# EAGLE board HW2 (EAGLE 8.6.0)
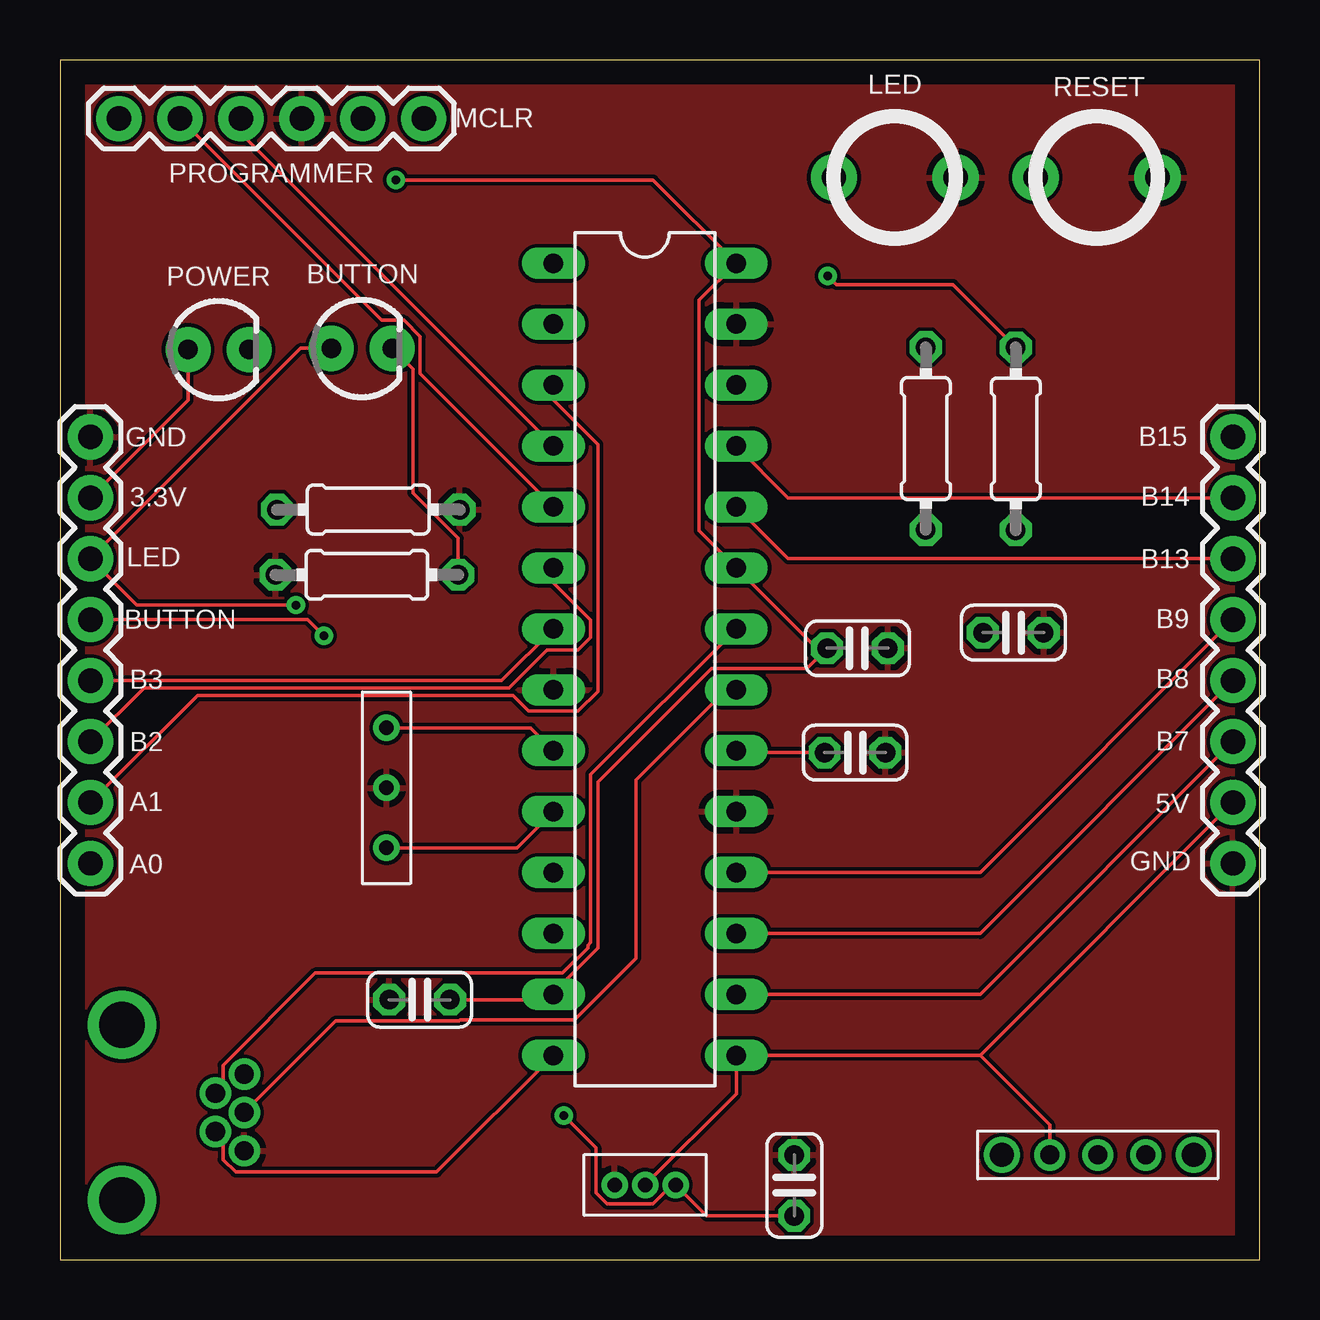
[diagram p0: board, top side]
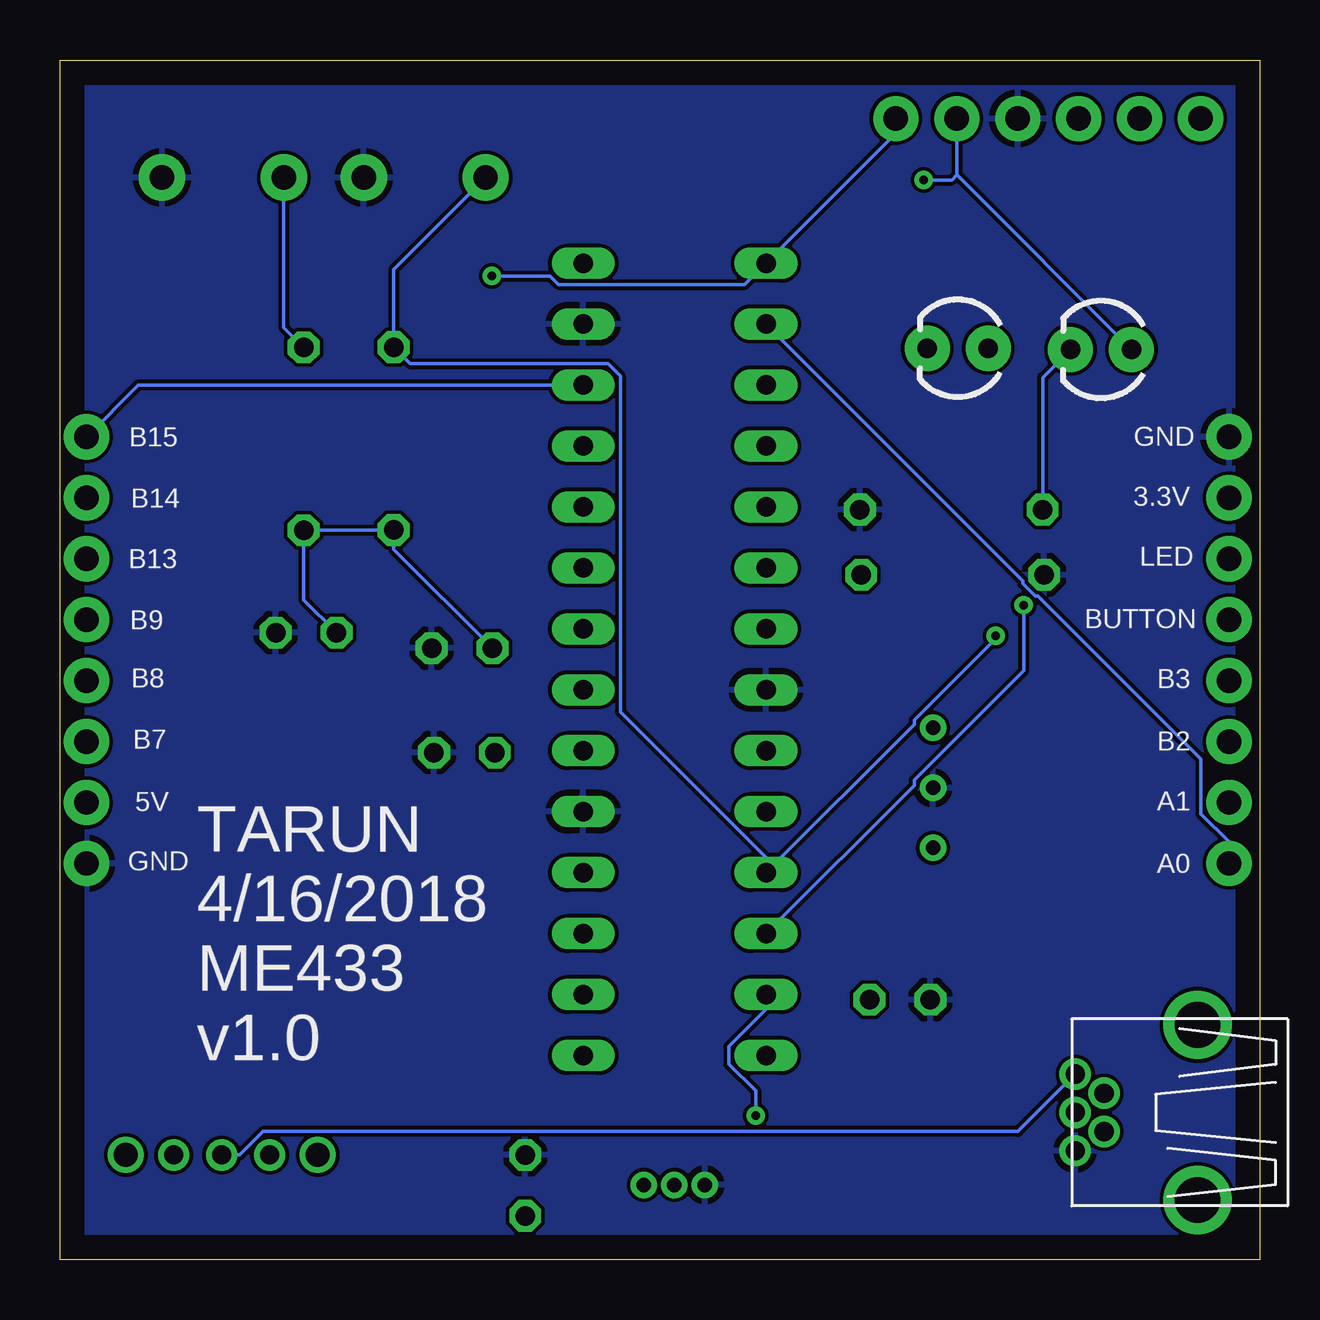
[diagram p1: board, bottom side, seen from below]

Size 50 x 50 mm. Coordinates in mm from the lower left corner, seen from the top.
Outline: 0,0 50,0 50,50 0,50 0,0
Copper layers (1*16): Top 0.035mm / dielectric 1.5mm / Bottom 0.035mm
Design rules "default": minimum track width 6mil, minimum drill 0.35mm, track to track 6mil, track to pad 6mil, pad to pad 6mil, via to via 6mil, smd to smd 6mil, copper to edge 40mil, drill to drill 6mil, minimum pad ring 10mil, minimum via ring 8mil, stop-mask expansion 4mil, vias tented up to drill 0mil, thermal gap 10mil

## Footprints (pad centres in the part's own frame; a part is rotated, then mirrored left to right if it is on the bottom)
C025-024X044 = drill 0.813 octagon: 1 -1.27,0; 2 1.27,0
LED_3MM = drill 0.813 pad 1.88: A -1.27,0; K 1.27,0
1X06 = drill 1.016 pad 1.88: 1 0,0; 2 2.54,0; 3 5.08,0; 4 7.62,0; 5 10.16,0; 6 12.7,0
1X08 = drill 1.016 pad 1.88: 1 0,0; 2 2.54,0; 3 5.08,0; 4 7.62,0; 5 10.16,0; 6 12.7,0; 7 15.24,0; 8 17.78,0
USB-MB-H = drill 0.8: D+ 5.1,0; D- 3.9,0.8; GND 5.1,-1.6; ID 3.9,-0.8; VBUS 5.1,1.6 | drill 1.9: P$6 0,-3.65; P$7 0,3.65
0204/7 = drill 0.813 octagon: 1 -3.81,0; 2 3.81,0
DIL28-3 = drill 0.813 long: 1 -16.51,-3.81; 2 -13.97,-3.81; 3 -11.43,-3.81; 4 -8.89,-3.81; 5 -6.35,-3.81; 6 -3.81,-3.81; 7 -1.27,-3.81; 8 1.27,-3.81; 9 3.81,-3.81; 10 6.35,-3.81; 11 8.89,-3.81; 12 11.43,-3.81; 13 13.97,-3.81; 14 16.51,-3.81; 15 16.51,3.81; 16 13.97,3.81; 17 11.43,3.81; 18 8.89,3.81; 19 6.35,3.81; 20 3.81,3.81; 21 1.27,3.81; 22 -1.27,3.81; 23 -3.81,3.81; 24 -6.35,3.81; 25 -8.89,3.81; 26 -11.43,3.81; 27 -13.97,3.81; 28 -16.51,3.81
BTN_2 = drill 1.016 pad 1.93: P$1 -2.54,0; P$2 2.54,0
1X3 = drill 0.6: GND 0,0; OSC1 -2.5,0; OSC2 2.5,0
1X3_VREG = drill 0.6: GND -1.27,0; VIN 0,0; VOUT 1.27,0
SWITCH = drill 0.8: 1 -2,0; 2 0,0; 3 2,0 | drill 1: P$3 -4,0; P$5 4,0

## Placement (x,y rotation side)
C1  10uF  [C025-024X044]  33.24,25.48 180 top
C2  10uF  [C025-024X044]  33.14,21.13 0 top
C3  10uF  [C025-024X044]  14.99,10.83 0 top
C4  10uF  [C025-024X044]  39.74,26.13 0 top
C5  0.1uF  [C025-024X044]  30.61,3.09 90 top
D1  [LED_3MM]  6.61,37.93 0 top
D2  [LED_3MM]  12.58,37.98 0 top
J1  [1X06]  15.16,47.56 180 top
J2  [1X08]  1.27,16.51 90 top
J4  [1X08]  48.9,16.51 90 top
J6  USB-MB-H  [USB-MB-H]  2.58,6.13 0 top
R1  330  [0204/7]  12.79,28.54 180 top
R2  10k  [0204/7]  36.09,34.22 90 top
R3  10k  [0204/7]  39.84,34.21 90 top
R4  330  [0204/7]  12.85,31.26 0 top
U$1  PIC32MX250F128B  [DIL28-3]  24.38,25.02 270 top
U$2  SWITCH_BTN_NO  [BTN_2]  34.8,45.1 0 top
U$3  SWITCH_BTN_NO  [BTN_2]  43.21,45.1 0 top
U$4  RESONATOR  [1X3]  13.61,19.66 270 top
U$5  VREG3_3V  [1X3_VREG]  24.39,3.11 0 top
U$6  SLIDESWITCH  [SWITCH]  43.26,4.36 0 top

## Library data of the parts
C1-C5 = rcl; SPICEPREFIX: C
D1 D2 = SparkFun-LED; PROD_ID: DIO-08794
J1 = SparkFun-Connectors; PROD_ID: CONN-08437
J2 J4 = SparkFun-Connectors; PROD_ID: CONN-08438
J6 U$1-U$6 = Ilya_Teach
R1-R4 = resistor

## Nets
3.3V: C1.2 C3.2 C4.1 C5.1 D1.A J1.2 J2.7 R2.1 R3.1 U$1.13 U$1.23 U$1.28 U$5.VOUT
5V: J4.2 U$1.15 U$5.VIN U$6.1
!MCLR: J1.1 R3.2 U$1.1 U$3.P$1
A0: J2.1 U$1.2
A1: J2.2 U$1.3
B2: J2.3 U$1.6
B3: J2.4 U$1.7
B7: J4.3 U$1.16
B8: J4.4 U$1.17
B9: J4.5 U$1.18
B13: J4.6 U$1.24
B14: J4.7 U$1.25
B15: J4.8 U$1.26
BUTTON1: J2.5 R2.2 U$1.11 U$2.P$1
D+: J6.D+ U$1.21
D-: J6.D- U$1.22
GND: C1.1 C2.2 C3.1 C4.2 C5.2 J1.3 J2.8 J4.1 J6.GND R1.2 R4.2 U$1.8 U$1.19 U$1.27 U$2.P$2 U$3.P$2 U$4.GND U$5.GND
ID: J6.ID U$1.14
LED1: D2.A J2.6 U$1.12
N$1: D1.K R4.1
N$4: C2.1 U$1.20
N$6: D2.K R1.1
OSC1: U$1.9 U$4.OSC1
OSC2: U$1.10 U$4.OSC2
PGEC1: J1.5 U$1.5
PGED1: J1.4 U$1.4
VBUSUSB: J6.VBUS U$6.2

## Tracks (layer width: path | path; a pad name or v marks a point on that pad's centre or on a via)
3.3V  (via drill 0.35)
  Top 0.152: J2.7 5.34,35.82 D1.A | v14,45 24.72,45 U$1.28 26.64,39.98 26.64,30.38 U$1.23 31.54,25.48 C1.2 31.13,24.64 27.16,24.64 22.42,19.9 22.42,12.99 20.57,11.14 U$1.13 20.35,10.83 C3.2 | U$5.VOUT 25.89,2.88 | 25.89,2.88 26.95,1.82 C5.1 | v21,6 22.34,4.66 22.34,2.79 22.8,2.33 24.71,2.33 25.27,2.88 25.89,2.88
  Bottom 0.152: J1.2 12.62,45.21 | 12.62,45.21 D1.A | C1.2 36.09,29.6 R2.1 R3.1 39.84,27.5 C4.1 | v14,45 12.83,45 12.62,45.21 | U$1.13 20.57,10.43 22.12,8.88 22.12,8.14 21,7.02 v21,6
5V
  Top 0.152: J4.2 38.35,8.51 | 38.35,8.51 U$1.15 28.19,6.91 U$5.VIN | 38.35,8.51 41.26,5.61 U$6.1
!MCLR  (via drill 0.35)
  Top 0.152: R3.2 37.22,40.64 32.36,40.64 v32,41
  Bottom 0.152: J1.1 15.16,46.94 20.55,41.55 U$1.1 21.46,40.64 29.22,40.64 29.58,41 v32,41 | U$3.P$1 40.67,38.85 R3.2
  other vias: 20.57,41.53
A0
  Bottom 0.152: J2.1 1.27,17.4 2.44,18.57 2.44,20.86 9.23,27.65 9.35,27.65 9.87,28.17 9.87,28.29 U$1.2
A1
  Top 0.152: J2.2 5.74,23.52 18.88,23.52 19.54,22.86 21.6,22.86 22.42,23.69 22.42,33.97 20.57,35.83 U$1.3
B2
  Top 0.152: J2.3 3.5,23.82 18.73,23.82 20.3,25.4 21.6,25.4 22.12,25.92 22.12,26.66 20.57,28.21 U$1.6
B3
  Top 0.152: J2.4 18.41,24.13 U$1.7
B7
  Top 0.152: U$1.16 38.35,11.05 J4.3
B8
  Top 0.152: J4.4 38.35,13.59 U$1.17
B9
  Top 0.152: U$1.18 38.35,16.13 J4.5
B13
  Top 0.152: U$1.24 30.35,29.21 J4.6
B14
  Top 0.152: U$1.25 30.35,31.75 J4.7
B15
  Bottom 0.152: U$1.26 46.73,36.45 J4.8
BUTTON1  (via drill 0.35)
  Top 0.152: v11,26 10.33,26.67 J2.5
  Bottom 0.152: U$2.P$1 36.09,41.27 R2.2 35.4,37.34 27.16,37.34 26.64,36.82 26.64,22.82 20.57,16.75 U$1.11 14.39,22.31 14.39,22.48 11,25.88 v11,26
D+
  Top 0.152: J6.D+ 11.49,9.94 16.63,9.94 16.69,10 21.44,10 24,12.56 24,20 27.75,23.75 U$1.21
D-
  Top 0.152: U$1.22 22.12,20.22 22.12,13.22 22,13.1 22,13 20.94,11.94 10.64,11.94 6.8,8.1 6.8,7.25 J6.D-
GND
  pour Top: 0,0 50.8,0 50.8,50.8 0,50.8
  pour Bottom: 0,0 50.8,0 50.8,50.8 0,50.8
ID
  Top 0.152: J6.ID 6.8,5.01 6.8,4.16 7.31,3.65 15.71,3.65 U$1.14
LED1  (via drill 0.35)
  Top 0.152: D2.A 10.04,37.98 J2.6 3.2,27.28 v9.83,27.28
  Bottom 0.152: U$1.12 14.39,19.77 14.39,19.98 9.83,24.55 v9.83,27.28
N$1
  Bottom 0.152: R4.1 9.04,36.77 D1.K
N$4
  Top 0.152: C2.1 28.27,21.13 U$1.20
N$6
  Top 0.152: D2.K 14.71,37.12 14.71,31.95 16.6,30.06 R1.1
OSC1
  Top 0.152: U$4.OSC1 19.62,22.16 U$1.9
OSC2
  Top 0.152: U$4.OSC2 19.06,17.16 U$1.10
PGEC1
  Top 0.152: U$1.5 15.02,36.92 15.02,38.46 14.33,39.15 13.41,39.15 J1.5
PGED1
  Top 0.152: U$1.4 7.54,46.94 J1.4
VBUSUSB
  Bottom 0.152: U$6.2 42.51,4.36 41.53,5.34 10.07,5.34 J6.VBUS

## Text on the board
tPlace: LED | RESET | MCLR | PROGRAMMER | POWER | BUTTON | GND | B15 | 3.3V | B14 | LED | B13 | BUTTON | B9 | B3 | B8 | B2 | B7 | A1 | 5V | GND | A0
bPlace: GND | B15 | 3.3V | B14 | LED | B13 | BUTTON | B9 | B3 | B8 | B2 | B7 | A1 | 5V | A0 | GND | TARUN / 4/16/2018 / ME433 / v1.0
209bmp: C:/Users/tarun/Downloads/152392955854984836.bmp